# Altium PCB back4_STM32F405.PcbDoc (part 2 of 3)
Units mil, origin at the board's own origin, x right, y up, seen from the top; angles counter-clockwise.
Board outline 3543.31 x 3543.31 mil, 4 copper layers (Top Layer, GND02, PWR03, Bottom Layer), stack 32.024 mil thick; 190 components, 150 nets, 1254 pads, 137 vias.
Unrouted connection lines stored in the file: 499.
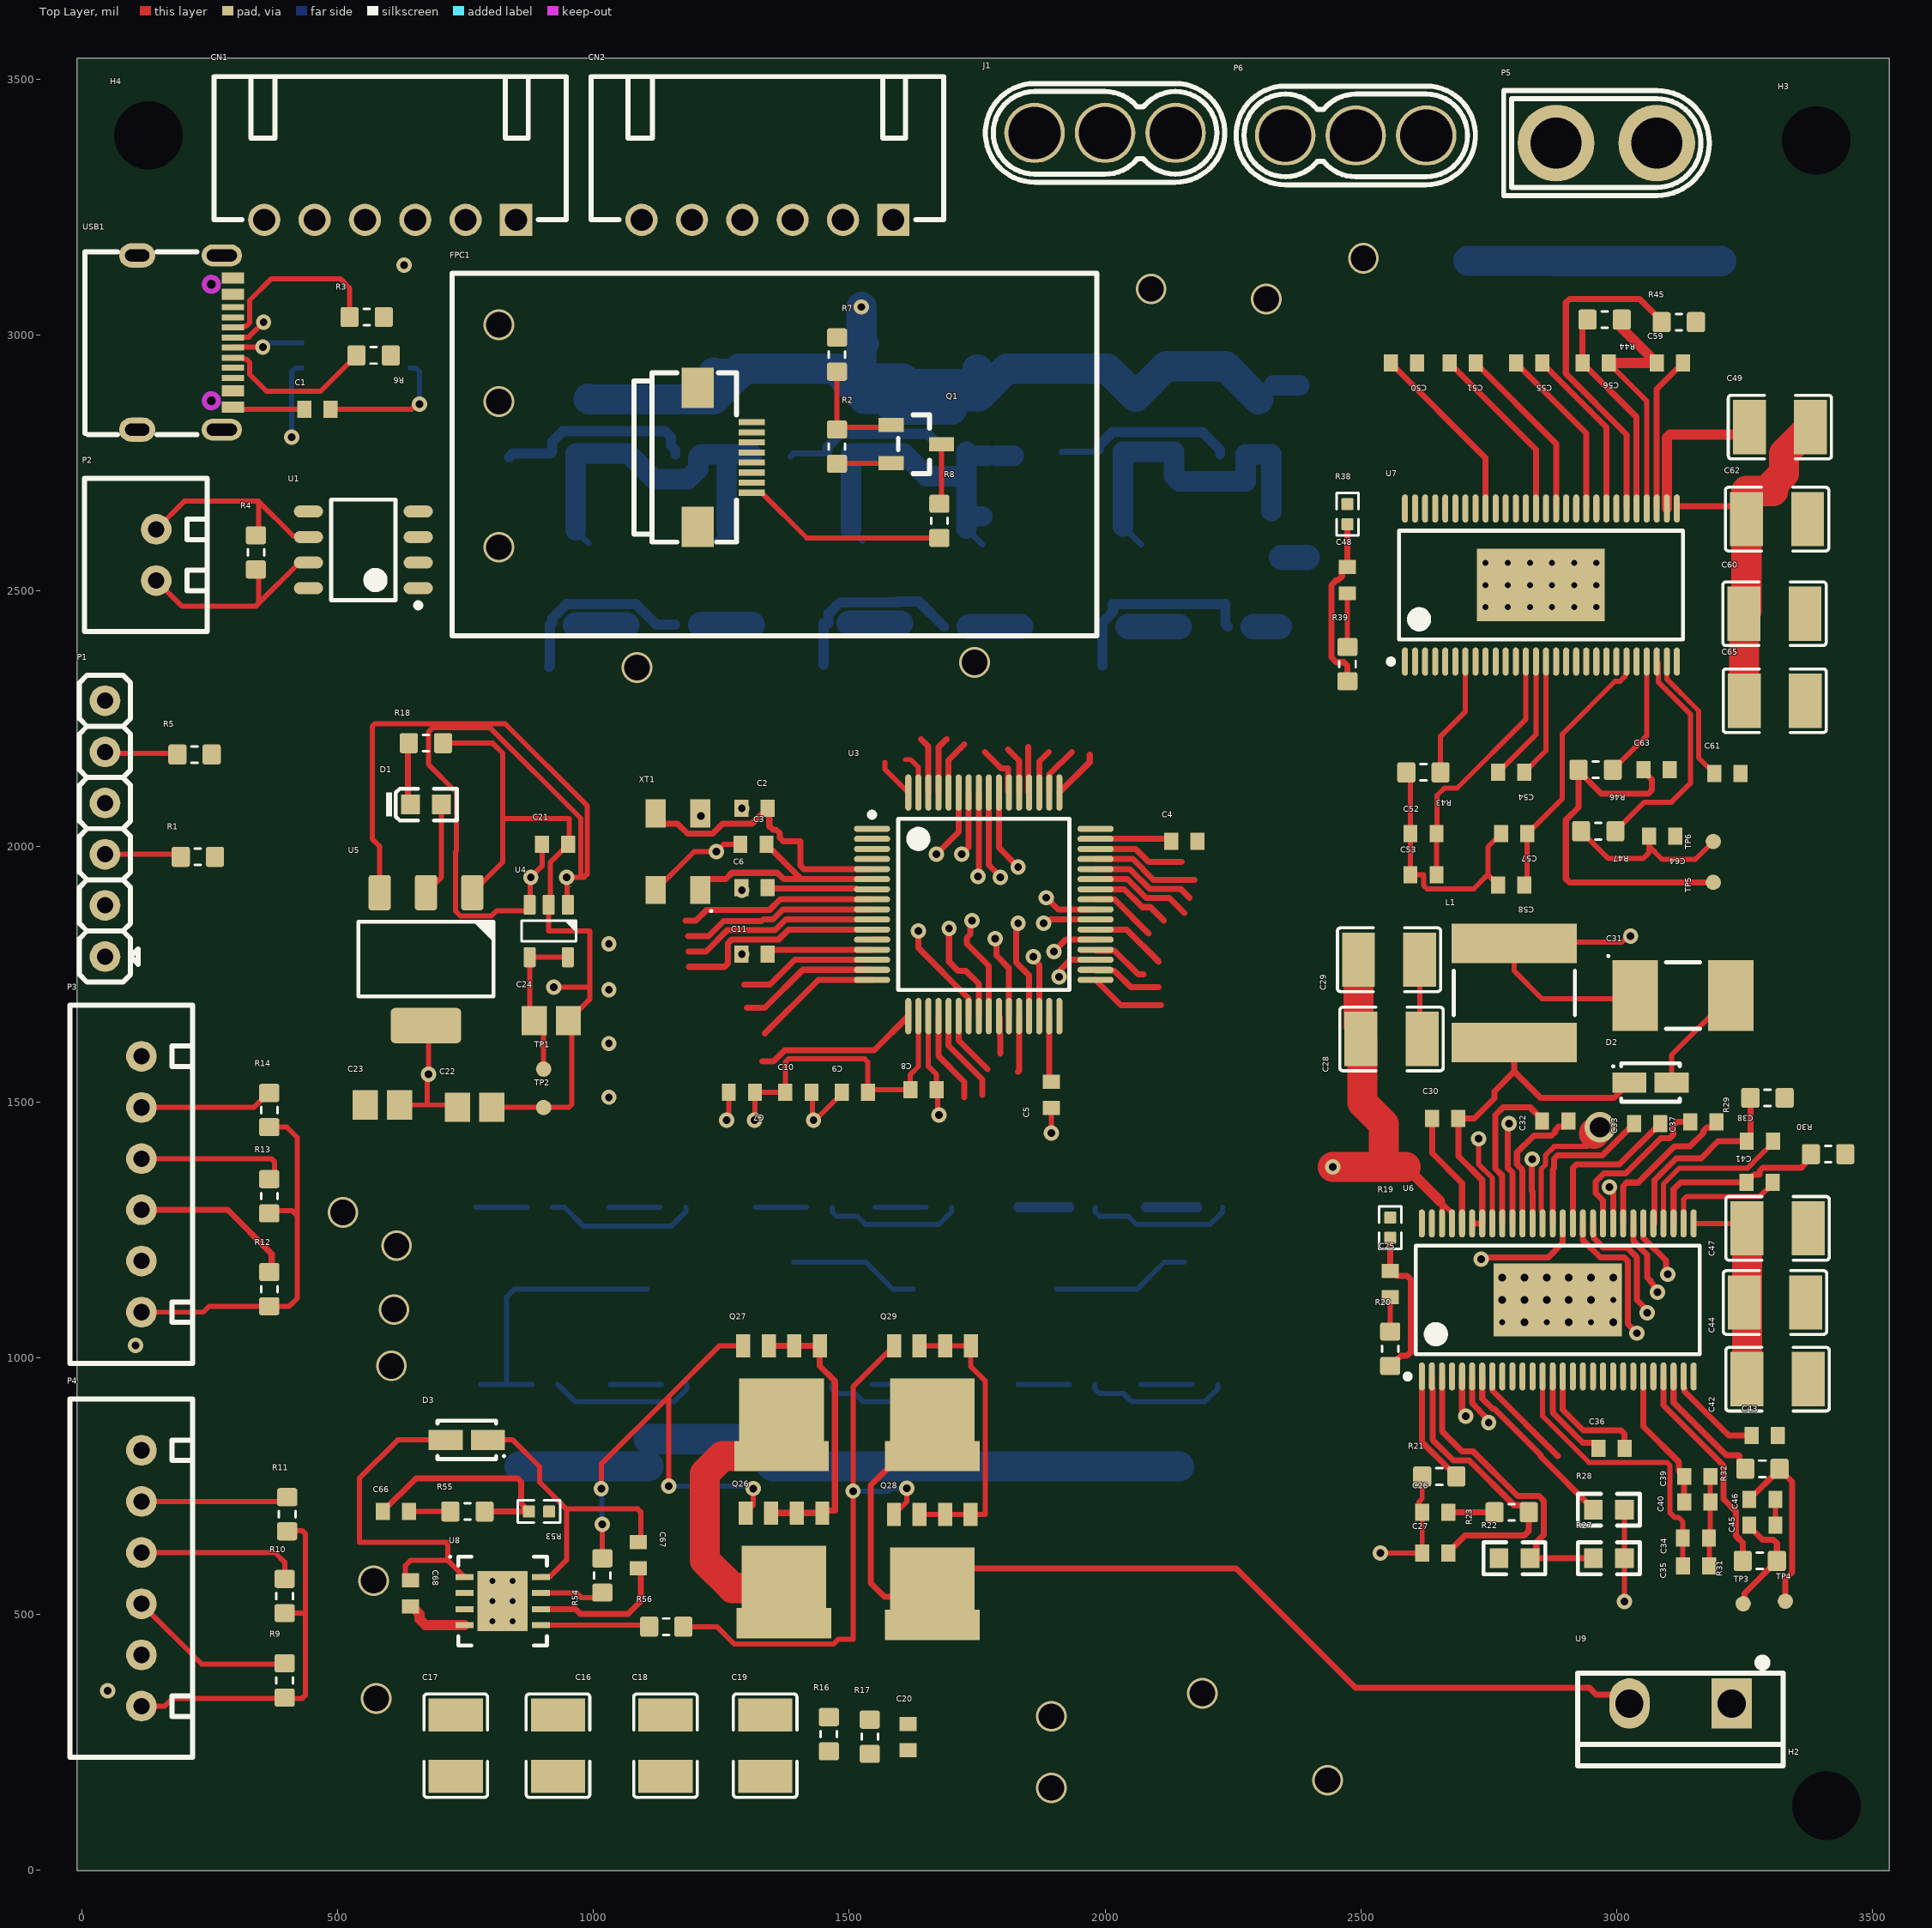
[diagram p0: Top Layer view]

## Part data (continued)
R36 R37 R51 R52: "RES SMD 0.0005 OHM 1% 3W 2512", Manufacturer=Riedon, Operating Temperature="-55°C ~ 170°C", Package / Case="2512 (6432 Metric)", Power (Watts)=3W, Supplier Device Package=2512, Supplier Part Number 1=696-1183-2-ND, Temperature Coefficient=±100ppm/°C, Tolerance=±1%, Category=Resistors, ComponentLink1Description=http://riedon.com/media/pdf/CSR.pdf, ComponentLink1URL=http://riedon.com/media/pdf/CSR.pdf, Composition="Metal Element", Failure Rate=-, Features="Current Sense", Height - Seated (Max)="0.057\" (1.45mm)", Manufacturer Part Number=CSR2512C0R0005F, Packaging="Tape & Reel (TR)", Part Status=Active, Pricing 1="2000=0.19817, 6000=0.1937, 10000=0.187, 50000=0.18148 (USD)", Pricing 2="1=0.69, 10=0.574, 25=0.4916, 50=0.4426, 100=0.3852, 250=0.3442, 500=0.27864, 1000=0.22536 (USD)", RoHS="RoHS Compliant", Size / Dimension="0.250\" L x 0.118\" W (6.35mm x 3.00mm)", Stock=2000, Supplier 1=Digi-Key, Supplier 2=Digi-Key, Supplier Part Number 2=696-1183-1-ND
SW1: "单刀拨码开关", Color=红色, JLCPCB Part Class="Extended Part", LCSC Part Name=红色宽体1位顶拨插件, Manufacturer=YE, Operating Life=-, Add into BOM=yes, Circuit=单刀单掷, Convert to PCB=yes, Datasheet=https://atta.szlcsc.com/upload/public/pdf/source/20240423/2AB41BE17D24959C6789B2A71E54D492.pdf, Device=DSWB01LHGET, Lead Pitch=-, Manufacturer Part=DSWB01LHGET, Name=DSWB01LHGET, Number of Positions=1位, Supplier=LCSC, Supplier Footprint=插件,9.9x4mm, Supplier Part=C126888, Symbol=DSWB01LHGET, Type=平拨,凸起式
SW2: "轻触开关", Actuator/Cap Color=白色带淡绿, Contact Current=50mA, Insulation Resistance=-, JLCPCB Part Class="Extended Part", LCSC Part Name="6*3.6*2.5mm 立贴 轻触开关", Manufacturer="XKB Connectivity(中国星坤)", Operating Force=260gf, Operating Temperature=-30℃~+85℃, Voltage Rating (DC)=12V, Actuator Style=矩形按钮, Add into BOM=yes, Circuit=单刀单掷, Convert to PCB=yes, Datasheet=https://atta.szlcsc.com/upload/public/pdf/source/20200227/C318938_C2E53B1EEDE37D980A33616AC086DE53.pdf, Device=TS-1101-C-W, IP Rating=-, Manufacturer Part=TS-1101-C-W, Mechanical Life=5万次, Mounting Style=立贴, Name=TS-1101-C-W, Pin Style=-, Power Rating=-, Strike Gundam=不带, Supplier=LCSC, Supplier Footprint=SMD, Supplier Part=C318938, Switch Height=2.5mm, Switch Length=6mm, Switch Width=3.6mm, Symbol=TS-1101-C-W, Voltage Rating (AC)=-, With Lamp=无
TP1 TP2 TP3 TP4 TP5 TP6: "SMD test pin"
U1: Manufacturer="Texas Instruments", Manufacturer Part Number=SN65HVD232DR, Operating Temperature="-40°C ~ 85°C", Package / Case="8-SOIC (0.154\", 3.90mm Width)", Supplier Device Package=8-SOIC, Supplier Part Number 1=296-26344-2-ND, Voltage - Supply="3 V ~ 3.6 V", Category="Integrated Circuits (ICs)", ComponentLink1Description=http://www.ti.com/lit/ds/symlink/sn65hvd230.pdf, ComponentLink1URL=http://www.ti.com/lit/ds/symlink/sn65hvd230.pdf, Data Rate=1Mbps, Duplex=Half, Mounting Type="Surface Mount", Number of Drivers/Receivers=1/1, Packaging="Tape & Reel (TR)", Part Status=Active, Pricing 1="2500=0.84375 (USD)", Pricing 2="1=2.05, 10=1.842, 100=1.4809, 500=1.21668, 1000=1.00811 (USD)", Protocol=CAN, RoHS="RoHS Compliant", Stock=5000, Supplier 1=Digi-Key, Supplier 2=Digi-Key, Supplier Part Number 2=296-26344-1-ND, Type=Transceiver
U2: JLCPCB Part Class="Extended Part", LCSC Part Name="USB转串口芯片 CH340", Manufacturer=WCH(南京沁恒), Add into BOM=yes, Convert to PCB=yes, Datasheet=https://atta.szlcsc.com/upload/public/pdf/source/20230530/6E401E9554E9F5311886CC8B3F89B62E.pdf, Device=CH340N, Manufacturer Part=CH340N, Name=CH340N, Supplier=LCSC, Supplier Footprint=SOP-8, Supplier Part=C2977777, Symbol=CH340N_C2977777
U3: "ARM Cortex-M4 32-bit MCU+FPU, 210 DMIPS, 1024 kB Flash, 192 kB Internal RAM, 51 I/Os, 64-pin LQFP, -40 to 85 degC, Tray", I/Os (High Current)=51, Manufacturer=STMicroelectronics, Operating Frequency(F) (Processor speed) (MHz)=168, Supplier Part Number 1=497-11767-ND, Supply Voltage(Vcc) max (V)=3.6, Supply Voltage(Vcc) min (V)=1.8, ComponentLink1Description="Manufacturer URL", ComponentLink1URL=http://www.st.com/web/en/home.html, ComponentLink2Description=Datasheet, ComponentLink2URL=http://www.st.com/st-web-ui/static/active/en/resource/technical/document/datasheet/DM00037051.pdf, ComponentLink3Description="Package Specification", ComponentLink3URL=http://www.st.com/st-web-ui/static/active/en/resource/technical/document/datasheet/DM00037051.pdf, Core="ARM Cortex-M4", D/A Converter=2x12-bit, DatasheetVersion="Rev. 4", FLASH Size (Prog) (kB)=1024, Internal RAM Size (kB)=192, Mounting Technology="Surface Mount", PackageDescription="64-Pin Low Profile Quad Flat Package, 10 x 10 mm Body, 0.5 mm Pitch", PackageReference=LQFP64, PackageVersion="Rev. 4, 06/2013", Packing=Tray, PartNumber=STM32F405RGT6, Supplier 1=Digi-Key, Supplier 2=Farnell, Supplier 3=Newark, Supplier 4=Mouser, Supplier Part Number 2=2064363, Supplier Part Number 3=73T2329, Supplier Part Number 4=511-STM32F405RGT6
U4: library part LP5907MFX-3.3/NOPB, "IC REG LDO 3.3V 0.25A SOT23-5", Current - Limit (Min)=-, Current - Output=250mA, Manufacturer="Texas Instruments", Operating Temperature="-40°C ~ 125°C", Package / Case="SC-74A, SOT-753", Supplier Device Package=SOT-23, Supplier Part Number 1=296-38557-1-ND, Voltage - Input="Up to 5.5V", Category="Integrated Circuits (ICs)", ComponentLink1Description=http://www.ti.com/lit/ds/symlink/lp5907.pdf, ComponentLink1URL=http://www.ti.com/lit/ds/symlink/lp5907.pdf, Mounting Type="Surface Mount", Packaging="Cut Tape (CT)", Part Status=Active, Pricing 1="1=0.57, 10=0.487, 100=0.3634, 500=0.28552, 1000=0.22063 (USD)", Regulator Topology="Positive Fixed", RoHS="RoHS Compliant", Stock 1=39845, Supplier 1=Digi-Key, Voltage - Dropout (Typical)=-, Voltage - Output=3.3V
U5: library part AZ1117EH-3.3TRG1, "IC REG LDO 3.3V 1A SOT223", Current - Limit (Min)=-, Current - Output=1A, Manufacturer="Diodes Incorporated", Operating Temperature="-40°C ~ 125°C", Package / Case="TO-261-4, TO-261AA", Supplier Device Package=SOT-223, Supplier Part Number 1=AZ1117EH-3.3TRG1DICT-ND, Voltage - Dropout (Typical)="1.1V @ 1A", Voltage - Input="Up to 13V", Category="Integrated Circuits (ICs)", ComponentLink1Description=http://www.diodes.com/assets/Datasheets/AZ1117E.pdf, ComponentLink1URL=http://www.diodes.com/assets/Datasheets/AZ1117E.pdf, Mounting Type="Surface Mount", Packaging="Cut Tape (CT)", Part Status=Active, Pricing 1="1=0.43, 10=0.321, 100=0.1815, 500=0.12022, 1000=0.09216 (USD)", Regulator Topology="Positive Fixed", RoHS="RoHS Compliant", Stock 1=22748, Supplier 1=Digi-Key, Voltage - Output=3.3V
U6 U7: "MOTOR DRIVER, 3PH, 56HTSSOP"
U8: "DRIVER, MOSFET, HALF BRIDGE, WSON-8, 1A", Supplier Part Number 1=2400642RL, Supplier 1=Farnell, Supplier 2=Farnell, Supplier 3=Farnell, Supplier Part Number 2=2400642, Supplier Part Number 3=2382850
U9: library part To-220-35W-3R-1%, "220封装2插电阻", JLCPCB Part Class="Extended Part", LCSC Part Name="3Ω ±1% 35W", Manufacturer=Milliohm(毫欧), Operating Temperature Range=-55℃~+150℃, Overload Voltage (Max)=350V, Power(Watts)=35W, Tolerance=±1%, Add into BOM=yes, Convert to PCB=yes, Datasheet=https://atta.szlcsc.com/upload/public/pdf/source/20221020/51BE5AE648F6C576EF2EAAB1AEBF3830.pdf, Device=To-220-35W-3R-1%, Manufacturer Part=To-220-35W-3R-1%, Name=3Ω, Supplier=LCSC, Supplier Footprint=TO-220-2, Supplier Part=C5209756, Symbol=TO-220-35W-3R-1%
USB1: Current Rating - Power (Max)=5A, JLCPCB Part Class="Extended Part", LCSC Part Name="Type-C 母 卧贴", Manufacturer="SHOU HAN(首韩)", Operating Temperature Range=-25℃~+85℃, Add into BOM=yes, Connector Type=Type-C, Convert to PCB=yes, Datasheet=https://atta.szlcsc.com/upload/public/pdf/source/20211123/39B17C16241EAC15C5E277BDA434118E.pdf, Device="TYPE-C 16PIN 2MD(073)", Gender=母, Manufacturer Part="TYPE-C 16PIN 2MD(073)", Mounting Style=卧贴, Name="TYPE-C 16PIN 2MD(073)", Number of Contacts=16P, Number of Ports=1, Standard=-, Supplier=LCSC, Supplier Footprint=SMD, Supplier Part=C2765186, Symbol="TYPE-C 16PIN 2MD(073)"
XT1: library part ABM3B-8.000MHZ-10-1-U-T, "Crystal 8MHz ±10ppm 10pF 200 Ohm -10°C ~ 60°C Surface Mount 4-SMD, No Lead (DFN, LCC)", Frequency Stability=±10ppm, Load Capacitance=10pF, Manufacturer="Abracon LLC", Operating Mode=Fundamental, Operating Temperature="-10°C ~ 60°C", Package / Case="4-SMD, No Lead", Ratings=-, Supplier Part Number 1=535-9721-1-ND, Category="Crystals, Oscillators, Resonators", ComponentLink1Description=http://www.abracon.com/Resonators/abm3b.pdf, ComponentLink1URL=http://www.abracon.com/Resonators/abm3b.pdf, Frequency Tolerance=±10ppm, Height - Seated (Max)="0.043\" (1.10mm)", Manufacturer Part Number=ABM3B-8.000MHZ-10-1-U-T, Mounting Type="Surface Mount", Packaging="Cut Tape (CT)", Part Status=Active, Pricing 1="1=0.69, 10=0.578, 50=0.5198, 100=0.462, 500=0.4389 (USD)", Pricing 2="1000=0.336, 3000=0.315, 5000=0.3045, 10000=0.294 (USD)", RoHS="RoHS Compliant", Size / Dimension="0.197\" L x 0.126\" W (5.00mm x 3.20mm)", Stock=35437, Supplier 1=Digi-Key, Supplier 2=Digi-Key, Supplier Part Number 2=535-9721-2-ND, Type="MHz Crystal"

## Via types
v1: diameter 30, hole 15, Top Layer to Bottom Layer, 76 vias
v2: diameter 27.56, hole 11.81, Top Layer to Bottom Layer, 42 vias
v3: diameter 60, hole 50, Top Layer to Bottom Layer, 18 vias
v4: diameter 60, hole 40, Top Layer to Bottom Layer, 1 vias

## Nets (pads, with @x,y where several pads share a name; then routed paths per layer and width w, separated by ;. In a path a pad name is that pad's centre, name@x,y a point inside that pad or via, vN(x,y) a via of type N, cw(c..) or ccw(c..) an arc to the next point about the centre after c; other vN are vias at no path point)
+5: C21.2 C31.1 L1.2 P1.1 P3.2 P4.2 R22.2 U4.1 U4.3 U5.3 | length 2752.8
  Top Layer w10: U5.3@581.84,1909.93 581.84,2000.56 567.39,2015.01 567.39,2235.01 572.39,2240.01 827.39,2240.01 987.39,2080.01 987.39,1945.87 981.53,1940.01 975.31,1940.01 ; U4.3@874.99,1886.19 876.19,1887.39 876.19,1938.81 899.35,1961.97 C21.2@899.35,2004.1 ; U4.3@877.39,1886.19 877.39,1883.67 868.18,1874.46 810.5,1874.46 800.53,1864.49 739.9,1864.49 730.29,1874.1 730.29,1989.18 732.01,1990.91 732.01,2105.99 677.14,2160.86 677.14,2223.78 686.18,2232.82 797.21,2232.82 975.31,2054.72 975.31,1940.01 ; U4.1@949.79,1886.19 948.59,1887.39 948.59,1938.81 v1(947.39,1940.01) 975.31,1940.01 ; v1(3027.39,1825.01) 3021.98,1825.01 3010.14,1813.18 2802.39,1813.18 L1.2@2799.91,1810.69 2799.91,1756.72 2854.08,1702.55 3030.1,1702.55 C31.1@3036.4,1708.85
  other v1: 877.39,1940.01
AGND: C1.1 C2.2 C3.2 C4.1 C5.1 C6.1 C7.1 C8.1 C9.1 C10.1 C11.1 C20.1 C21.1 C22.1 C23.1 C24.1 C25.1 C26.2 C27.2 C28.1 C29.1 C31.2 C34.1 C35.1 C39.2 C40.2 C42.1 C43.1 C44.1 C45.1 C46.1 C47.1 C48.1 C52.1 C53.1 C57.2 C58.2 C60.1 C61.1 C62.1 C63.1 C64.1 C65.1 C66.1 CN1.6 CN2.6 D2.A FPC1.2 FPC1.9 FPC1.10 P1.4 P3.6 P4.6 Q28.S Q29.S R7.1 R17.1 R18.1 R20.1 R21.2 R27.1 R28.2 R39.1 R43.2 R55.1 SW1.2 SW2.2 TP2.1 U1.2 U2.3 U3.12 U3.18 U3.63 U4.2 U5.1 U6.28 U6.57 U7.28 U7.55 U7.57 U8.9 USB1.1 USB1.12 USB1.13 USB1.14 XT1.G | length 4952.3
  Top Layer w10: USB1.12@295,2859.17 299.17,2855 C1.1@434.41,2855 ; C66.1@639.09,700.25 R55.1@720.04,700.25 ; R18.1@705.86,2202.14 802.76,2202.14 822.39,2182.51 822.39,2055.01 ; U5.1@762.94,1909.93 822.39,1969.38 822.39,2055.01 ; C22.1@800.85,1490.01 TP2.1@902.39,1490.01 951.53,1490.01 957.39,1495.87 957.39,1653.48 C24.1@950.86,1660.01 992.39,1701.55 992.39,1725.01 ; v1(922.39,1725.01) 992.39,1725.01 ; XT1.G@1121.69,1915.2 1196.49,1990 v1(1239.8,1990) 1254.24,2004.44 C3.2@1287.01,2004.44 ; v1(1315,1465) 1315.29,1465.29 1315.29,1519.7 C7.1@1315.59,1520 C10.1@1375,1520 1375,1579.14 1380.86,1585 1530.32,1585 1536.18,1579.14 C9.1@1536.18,1525 ; C9.1@1536.18,1520 1541.18,1525 C8.1@1619.41,1525 1619.41,1554.41 1634.98,1569.98 U3.18@1634.98,1668.56 ; U3.12@1544.43,1818.17 1545.34,1819.07 1574.34,1819.07 U3.12@1575.31,1818.09 ; 1610,2170 1620,2170 1634.99,2155.01 U3.63@1634.99,2105.56 ; Q28.S@1637.2,694.34 Q28.S@1687.2,694.34 Q28.S@1737.2,694.34 1737.48,694.62 1766,694.62 1766,955.08 1737.48,983.6 Q29.S@1737.48,1024.34 Q29.S@1687.48,1024.34 Q29.S@1637.48,1024.34 ; v1(1895,1440) C5.1@1895,1489.41 ; R39.1@2473.93,2390.01 C48.1@2473.93,2495.01 ; v1(2538.37,618.84) C27.2@2619.91,618.84 C26.2@2619.91,698.84 2613.69,705.06 2613.69,719.36 2619.91,725.58 R21.2@2619.91,768.84 ; R20.1@2557.39,1051.94 C25.1@2557.39,1119.42 ; R43.2@2588.93,2145.01 2596.8,2137.14 C52.1@2596.8,2025.01 C53.1@2596.8,1945.01 2623.2,1945.01 2623.2,1923.72 2629.64,1917.28 2720.6,1917.28 2748.33,1945.01 ; C28.1@2619.65,1623.84 2614.91,1628.58 C29.1@2614.91,1778.84 C29.1@2619.91,1783.84 ; C58.2@2768.34,1925.01 2748.33,1945.01 ; C57.2@2773.93,2025.01 2748.33,1999.42 2748.33,1945.01 ; v1@3014.91,523.84 v1(3015.22,524.16) R27.1@3015.22,608.84 R28.2@3015.22,703.84 ; D2.A@3107.58,1538.84 3107.58,1593.02 C31.2@3223.41,1708.85 ; C35.1@3181.09,593.84 3181.09,648.25 C34.1@3180.5,648.84 3183.21,651.56 C40.2@3183.21,718.84 C39.2@3183.21,768.84 ; C45.1@3310.5,673.84 3310.5,715.97 C46.1@3318.37,723.84 ; 822.39,2055.01 952.39,2055.01 952.39,2005.96 C21.1@950.53,2004.1 915.35,1968.92 915.35,1889.15 U4.2@912.39,1886.19 912.39,1835.01 992.39,1835.01 992.39,1725.01
  other v1: 2819.95,1070.54 2906.56,1070.54 2993.17,1070.54 2776.64,1113.84 2819.95,1113.84 2863.25,1113.84 2906.56,1113.84 2949.87,1113.84 2776.64,1157.15 2819.95,1157.15 2863.25,1157.15 2906.56,1157.15 2949.87,1157.15 2993.17,1157.15 1290,1790 1290,1915 1210,2060 1290,2075
  other v2: 802.52,485.88 841.89,485.88 802.52,525.25 841.89,525.25 802.52,564.62 841.89,564.62 2776.64,1070.54 2819.95,1070.54 2863.25,1070.54 2906.56,1070.54 2949.87,1070.54 2993.17,1070.54 2776.64,1113.84 2819.95,1113.84 2863.25,1113.84 2906.56,1113.84 2949.87,1113.84 2993.17,1113.84 2776.64,1157.15 2819.95,1157.15 2863.25,1157.15 2906.56,1157.15 2949.87,1157.15 2993.17,1157.15 2743.81,2467.87 2787.11,2467.87 2830.42,2467.87 2873.73,2467.87 2917.04,2467.87 2960.34,2467.87 2743.81,2511.18 2787.11,2511.18 2830.42,2511.18 2873.73,2511.18 2917.04,2511.18 2960.34,2511.18 2743.81,2554.48 2787.11,2554.48 2830.42,2554.48 2873.73,2554.48 2917.04,2554.48 2960.34,2554.48
AUX_H_1: U3.30 U8.2 | length 121.1
  Top Layer w11.81: v1(1860,1785) 1860,1780.08 1871.21,1768.87 U3.30@1871.21,1668.56
AUX_L_1: U3.29 U8.3 | length 193.2
  Top Layer w11.81: v1(1830,1850) 1826.52,1846.52 1826.52,1773.32 1851.52,1748.32 U3.29@1851.52,1668.56
AUX_TEMP_1: C66.2 R53.1 R55.2 U3.21 | length 632.5
  Top Layer w11.81: C66.2@587.91,700.25 652.91,765.25 851.58,765.25 858.5,758.33 858.5,715.56 R53.1@873.82,700.25 R55.2@786.97,700.25 ; U3.21@1694.04,1668.56 1694.04,1610.96 1760,1545 1760,1515
AVCC: C24.2 R19.2 R38.2 R53.2 TP1.1 U4.4 U4.5 U6.24 U7.24 | length 305
  Top Layer w10: TP1.1@902.39,1565.01 902.39,1641.55 C24.2@883.93,1660.01 874.99,1668.95 U4.4@874.99,1783.83 U4.5@949.79,1783.83
BOOT0_1: R15.1 SW1.1 U3.60 | length 107.3
  Top Layer w11.81: U3.60@1694.04,2105.57 1694.04,2169.04 1725,2200
CAN_D_1: U1.1 U3.62 | length 110.5
  Top Layer w11.81: 1640,2210 1654.67,2195.33 U3.62@1654.67,2105.56
CAN_R_1: U1.4 U3.61 | length 110.9
  Top Layer w11.81: U3.61@1674.35,2105.56 1674.35,2194.35 1690,2210